# EAGLE board fDrive.RP2040 (EAGLE 9.6.2)

Size 68 x 58 mm. Coordinates in mm from the lower left corner, seen from the top.
Outline: 0,4 0,54 arc-90 4,58 64,58 arc-90 68,54 68,4 arc-90 64,0 4,0 arc-90 0,4
Copper layers (1*16): Top 0.035mm / dielectric 1.5mm / Bottom 0.035mm
Design rules "default": minimum track width 10mil, minimum drill 24mil, track to track 8mil, track to pad 8mil, pad to pad 8mil, via to via 8mil, smd to smd 8mil, copper to edge 40mil, drill to drill 8mil, minimum pad ring 10mil, minimum via ring 8mil, stop-mask expansion 4mil, vias tented up to drill 0mil, thermal gap 10mil

## Footprints (pad centres in the part's own frame; a part is rotated, then mirrored left to right if it is on the bottom)
B3F-10XX = drill 1.016 long: 1 -3.251,2.261; 2 3.251,2.261; 3 -3.251,-2.261; 4 3.251,-2.261
1206 = smd 1.6 x 1.803: A -1.422,0; C 1.422,0
SO-08 = smd 0.6 x 2.2: 1 -1.905,-2.6; 2 -0.635,-2.6; 3 0.635,-2.6; 4 1.905,-2.6; 5 1.905,2.6; 6 0.635,2.6; 7 -0.635,2.6; 8 -1.905,2.6
1X07 = drill 1.016 long: 1 -7.62,0; 2 -5.08,0; 3 -2.54,0; 4 0,0; 5 2.54,0; 6 5.08,0; 7 7.62,0
1X09-BIG = drill 1.016 pad 1.778 octagon: 1 -10.16,0; 2 -7.62,0; 3 -5.08,0; 4 -2.54,0; 5 0,0; 6 2.54,0; 7 5.08,0; 8 7.62,0; 9 10.16,0
SOLDERJUMPER_ARROW_NOPASTE = smd 0.762 x 1.524: 1 -1.016,0; 2 1.016,0

## Placement (x,y rotation side)
AUTHORIZE  [B3F-10XX]  20,8 180 top
AUTHORIZED  [1206]  33,39.67 180 top
BUTTON_PRESSED  [1206]  34,8 180 top
FLASH_AT25SF321B_4MB  25AA080SN  [SO-08]  31,28 270 top
MCU_LEFT_SIDE  [1X07]  56,20 0 top
MCU_RIGHT_SIDE  [1X07]  56,35 180 top
MODE  [B3F-10XX]  48.4,8 180 top
POWER  [1206]  57.67,53.29 180 top
R_ARRAY_8  [1X09-BIG]  3.81,27.56 270 top
RUNNING  [1206]  33,16.97 180 top
WRITE_DISABLED  [SOLDERJUMPER_ARROW_NOPASTE]  16,29 90 top

## Library data of the parts
AUTHORIZE MODE = switch-omron; MPN: B3F-1000; OC_FARNELL: 176432; OC_NEWARK: 36M3542
AUTHORIZED BUTTON_PRESSED POWER R_ARRAY_8 RUNNING = adafruit
FLASH_AT25SF321B_4MB = microchip; MF: MICROCHIP; MPN: 25AA080/SN; OC_FARNELL: 1816072; OC_NEWARK: 92C7351
MCU_LEFT_SIDE MCU_RIGHT_SIDE = pinhead
WRITE_DISABLED = microbuilder; BOM: EXCLUDE

## Nets
GND: FLASH_AT25SF321B_4MB.4 MCU_LEFT_SIDE.6 R_ARRAY_8.1 WRITE_DISABLED.1
MCU_D0: AUTHORIZED.A MCU_RIGHT_SIDE.1
MCU_D1: MCU_RIGHT_SIDE.2 RUNNING.A
MCU_D2: MCU_RIGHT_SIDE.3 MODE.1
MCU_D3: AUTHORIZE.1 MCU_RIGHT_SIDE.4
MCU_D4: BUTTON_PRESSED.A MCU_RIGHT_SIDE.5
MCU_D5: MCU_RIGHT_SIDE.6
MCU_D6: MCU_RIGHT_SIDE.7
MCU_D7_CS: FLASH_AT25SF321B_4MB.1 MCU_LEFT_SIDE.1
MCU_D8_SCK: FLASH_AT25SF321B_4MB.6 MCU_LEFT_SIDE.2
MCU_D9_MISO: FLASH_AT25SF321B_4MB.2 MCU_LEFT_SIDE.3
MCU_D10_MOSI: FLASH_AT25SF321B_4MB.5 MCU_LEFT_SIDE.4
MCU_VCC_5V: MCU_LEFT_SIDE.7
RA_1: POWER.C R_ARRAY_8.2
RA_2: AUTHORIZED.C R_ARRAY_8.3
RA_3: R_ARRAY_8.4 RUNNING.C
RA_4: R_ARRAY_8.5
RA_5: MODE.4 R_ARRAY_8.6
RA_6: AUTHORIZE.4 R_ARRAY_8.7
RA_7: BUTTON_PRESSED.C R_ARRAY_8.8
VCC_33: FLASH_AT25SF321B_4MB.7 FLASH_AT25SF321B_4MB.8 MCU_LEFT_SIDE.5 POWER.A
WP: FLASH_AT25SF321B_4MB.3 WRITE_DISABLED.2

## Tracks (layer width: path | path; a pad name or v marks a point on that pad's centre or on a via)
GND  (3 unrouted)
MCU_D0  (1 unrouted)
MCU_D1  (1 unrouted)
MCU_D2  (1 unrouted)
MCU_D3  (1 unrouted)
MCU_D4  (1 unrouted)
MCU_D7_CS  (1 unrouted)
MCU_D8_SCK  (1 unrouted)
MCU_D9_MISO  (1 unrouted)
MCU_D10_MOSI  (1 unrouted)
RA_1  (1 unrouted)
RA_2  (1 unrouted)
RA_3  (1 unrouted)
RA_5  (1 unrouted)
RA_6  (1 unrouted)
RA_7  (1 unrouted)
VCC_33  (3 unrouted)
WP  (1 unrouted)

## Text on the board
tNames: + | GND | + | D6 | D5 | D4 | D3 | D2 | D1 | D0 | + | 3V | D7_CS | SCk | MISO | MOSI | GND | + | v2023.02 | C:/DVT/Fred.PCB/2023/fDrive.RP2040/MadeInTheUSB.Logo.Gray.bmp | C:/DVT/Fred.PCB/2023/fDrive.RP2040/MadeInTheUSB.Logo.Gray.bmp | C:/DVT/Fred.PCB/2023/fDrive.RP2040/MadeInTheUSB.Logo.Gray.bmp | C:/DVT/Fred.PCB/2023/fDrive.RP2040/MadeInTheUSB.Logo.Gray.bmp | C:/DVT/Fred.PCB/2023/fDrive.RP2040/Title.fDrive.Logo.Gray.bmp | C:/DVT/Fred.PCB/2023/fDrive.RP2040/Title.fDrive.Logo.Gray.bmp | C:/DVT/Fred.PCB/2023/fDrive.RP2040/Title.fDrive.Logo.Gray.bmp | C:/DVT/Fred.PCB/2023/fDrive.RP2040/Title.fDrive.Logo.Gray.bmp | C:/DVT/Fred.PCB/2023/fDrive.RP2040/Title.fDrive.Logo.Gray.bmp | C:/DVT/Fred.PCB/EXTENSIONS/BNSK-Rambo-Converters-Device/Rambo.BW.bmp | C:/DVT/Fred.PCB/EXTENSIONS/BNSK-Rambo-Converters-Device/Title.Converters Automation Device.bmp | C:/DVT/Fred.PCB/EXTENSIONS/BNSK-Rambo-Converters-Device/Title.RAMBO.bmp | C:/DVT/Fred.PCB/EXTENSIONS/BNSK-Rambo-Converters-Device/Title.bmp
bNames: www.FredericTorres.com | PCBv1 - 2023.1